# EAGLE board pdb_v3 (EAGLE 9.4.2)
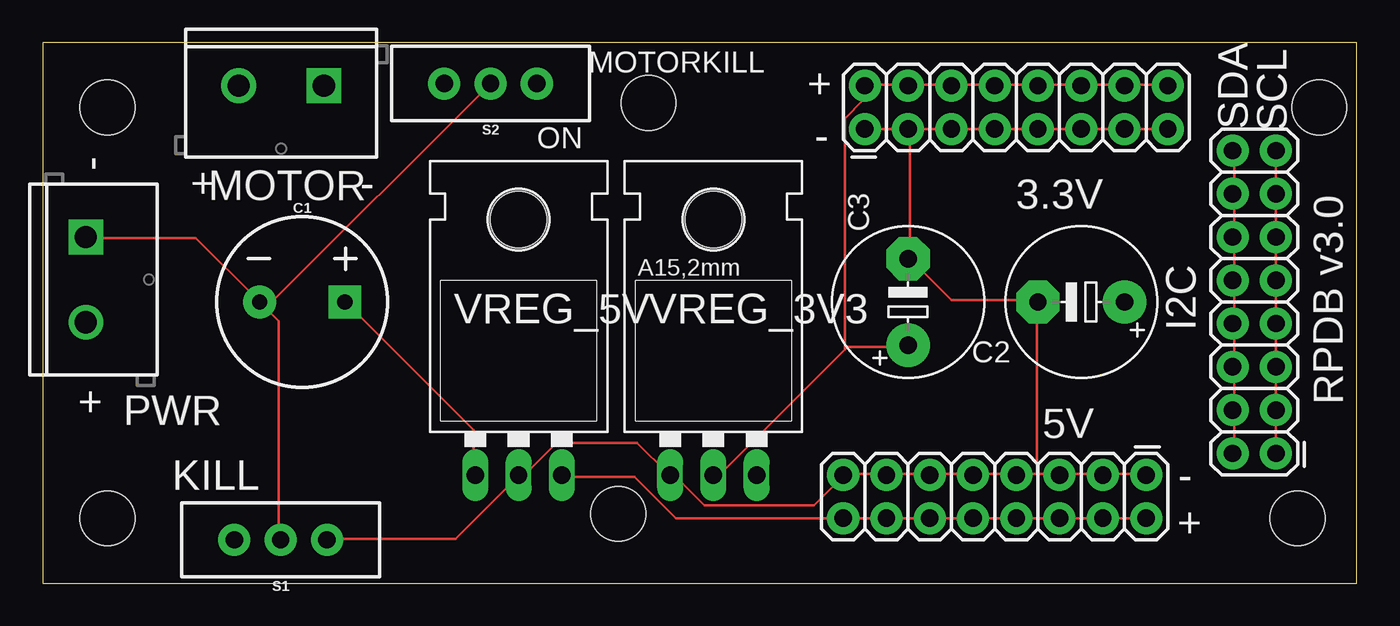
[diagram p0: board, top side]
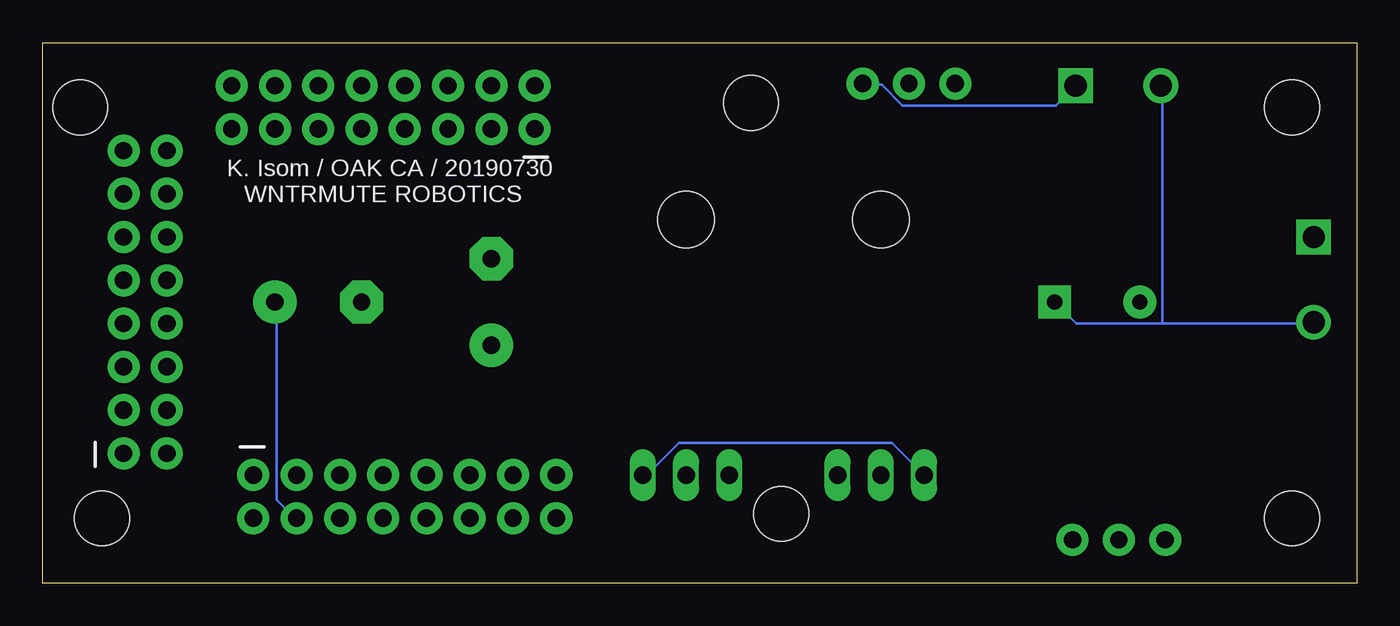
[diagram p1: board, bottom side, seen from below]

Size 77.14 x 31.74 mm. Coordinates in mm from the lower left corner, seen from the top.
Outline: 0,0 77.14,0 77.14,31.74 0,31.74 0,0
Copper layers (1*16): Top 0.035559375mm / dielectric 1.6mm / Bottom 0.035559375mm
Design rules "oshpark-2layer": minimum track width 6mil, minimum drill 10mil, track to track 6mil, track to pad 6mil, pad to pad 6mil, via to via 6mil, smd to smd 6mil, copper to edge 15mil, drill to drill 6mil, minimum pad ring 5mil, minimum via ring 5mil, stop-mask expansion 2.5mil, vias tented up to drill 0mil, thermal gap 10mil
Holes 3.2 mm at 3.81,27.94 3.81,3.81 74.93,27.94 73.66,3.81 33.78,4.06 35.56,28.19

## Footprints (pad centres in the part's own frame; a part is rotated, then mirrored left to right if it is on the bottom)
2X8 = drill 1.016 pad 1.88: 1 0,0; 2 0,2.54; 3 2.54,0; 4 2.54,2.54; 5 5.08,0; 6 5.08,2.54; 7 7.62,0; 8 7.62,2.54; 9 10.16,0; 10 10.16,2.54; 11 12.7,0; 12 12.7,2.54; 13 15.24,0; 14 15.24,2.54; 15 17.78,0; 16 17.78,2.54
CPOL-RADIAL-5MM-10MM = drill 0.9 pad 1.93 square: + 2.5,0 | drill 0.9 pad 1.93: - -2.5,0
E5-8,5 = drill 1.016 pad 2.54: + -2.54,0 | drill 1.016 pad 2.54 octagon: - 2.54,0
SCREWTERMINAL-5MM-2 = drill 1.3 pad 2.032 square: 1 0,0 | drill 1.3 pad 2.032: 2 5,0
SWITCH_SPDT_PTH_11.6X4.0MM_LOCK = drill 1.016 pad 1.88: 1 0,2.718; 2 0,0; 3 0,-2.718
78XXL = drill 1.016 long: GND 0,-3.81; IN -2.54,-3.81; OUT 2.54,-3.81 | hole 3.302: 0,11.176
TO-220-ALT = drill 1.016 long: GND 0,-3.81; IN -2.54,-3.81; OUT 2.54,-3.81 | hole 3.302: 0,11.176

## Placement (x,y rotation side)
3V3  [2X8]  48.26,26.67 0 top
5V  [2X8]  64.77,6.35 180 top
C1  1000uF  [CPOL-RADIAL-5MM-10MM]  15.24,16.51 0 top
C2  100uF  [E5-8,5]  60.96,16.51 180 top
C3  100uF  [E5-8,5]  50.8,16.51 90 top
DIRECT  [SCREWTERMINAL-5MM-2]  16.51,29.21 180 top
EXT  [SCREWTERMINAL-5MM-2]  2.54,20.32 270 top
FRAME1  FRAME-LETTERNO_PACKAGE  [DUMMY]  -41.91,52.07 0 top  (outside the outline)
I2C  [2X8]  72.39,7.62 90 top
S1  KILLSW  [SWITCH_SPDT_PTH_11.6X4.0MM_LOCK]  13.97,2.54 90 top
S2  MOTOKILL  [SWITCH_SPDT_PTH_11.6X4.0MM_LOCK]  26.29,29.34 90 top
VREG_3V3  LD33V  [78XXL]  39.37,10.16 0 top
VREG_5V  LM7805  [TO-220-ALT]  27.94,10.16 0 top

## Library data of the parts
3V3 5V I2C = SparkFun-Connectors
C1 = SparkFun-Capacitors; PROD_ID: CAP-09538
C2 C3 = rcl; SPICEPREFIX: C
DIRECT EXT = SparkFun-Connectors; SF_SKU: PRT-08432
FRAME1 = SparkFun-Aesthetics; DESIGNER: K. Isom / WNTRMUTE ROBOTICS; REV: 3.0; VERSION: 3.0
S1 S2 = SparkFun-Switches; PROD_ID: SWCH-08261; SF_SKU: COM-00102
VREG_3V3 = SparkFun-IC-Power
VREG_5V = SparkFun-IC-Power; PROD_ID: VREG-08450; SF_ID: COM-00107

## Nets
3.3V: 3V3.2 3V3.4 3V3.6 3V3.8 3V3.10 3V3.12 3V3.14 3V3.16 C3.+ VREG_3V3.GND
5V: 5V.2 5V.4 5V.6 5V.8 5V.10 5V.12 5V.14 5V.16 C2.+ VREG_5V.OUT
GND: 3V3.1 3V3.3 3V3.5 3V3.7 3V3.9 3V3.11 3V3.13 3V3.15 5V.1 5V.3 5V.5 5V.7 5V.9 5V.11 5V.13 5V.15 C2.- C3.- S1.3 VREG_3V3.IN VREG_5V.GND
N$1: C1.- EXT.1 S1.2 S2.2
N$7: I2C.1 I2C.3 I2C.5 I2C.7 I2C.9 I2C.11 I2C.13 I2C.15
N$9: I2C.2 I2C.4 I2C.6 I2C.8 I2C.10 I2C.12 I2C.14 I2C.16
N$11: DIRECT.1 S2.3
VCC: C1.+ DIRECT.2 EXT.2 VREG_3V3.OUT VREG_5V.IN

## Tracks (layer width: path | path; a pad name or v marks a point on that pad's centre or on a via)
3.3V
  Top 0.152: 53.34,29.26 50.9,29.26 3V3.4 50.75,29.26 48.31,29.26 3V3.2 48.16,29.11 48.16,28.35 47.09,27.28 47.09,13.72 | 3V3.16 65.99,29.26 63.55,29.26 3V3.14 63.4,29.26 60.96,29.26 | 60.96,29.26 58.52,29.26 3V3.10 58.37,29.26 55.93,29.26 3V3.8 55.78,29.26 53.34,29.26 | 60.96,29.26 3V3.12 | 53.34,29.26 3V3.6 | 47.09,13.72 47.24,13.87 50.75,13.87 C3.+ | 47.09,13.72 39.78,6.4 39.47,6.4 VREG_3V3.GND
5V
  Top 0.152: VREG_5V.OUT 30.48,6.25 34.75,6.25 37.19,3.81 5V.16 5V.14 5V.12 5V.10 5V.8 5V.6 5V.4 5V.2
  Bottom 0.152: C2.+ 63.4,16.46 63.4,4.88 62.33,3.81 5V.4
GND
  Top 0.152: S1.3 16.76,2.59 24.23,2.59 27.89,6.25 VREG_5V.GND 28.04,6.4 28.35,6.4 30.18,8.23 34.9,8.23 36.73,6.4 VREG_3V3.IN 36.88,6.25 37.19,6.25 38.86,4.57 45.26,4.57 46.94,6.25 5V.15 47.09,6.4 49.53,6.4 | 5V.1 64.77,6.4 62.33,6.4 5V.3 62.18,6.4 59.74,6.4 5V.5 59.59,6.4 58.37,6.4 | 57.15,6.4 54.71,6.4 5V.9 54.56,6.4 52.12,6.4 5V.11 51.97,6.4 49.53,6.4 | 49.53,6.4 5V.13 | 57.15,6.4 58.37,6.4 | 57.15,6.4 5V.7 | 3V3.15 3V3.13 3V3.11 3V3.9 3V3.7 3V3.5 50.9,26.67 | 3V3.1 3V3.3 50.9,26.67 | 50.9,26.67 50.9,19.05 | 50.9,19.05 53.34,16.61 58.37,16.61 C2.- 58.37,16.46 58.37,6.4 | 50.9,19.05 C3.-
N$1
  Top 0.152: 13.11,16.15 12.8,16.46 C1.- | 13.11,16.15 13.87,15.39 13.87,2.59 S1.2 | 13.11,16.15 S2.2 | 13.11,16.15 C1.- | EXT.1 2.59,20.27 8.99,20.27 12.65,16.61 C1.-
N$7
  Top 0.152: I2C.15 I2C.13 I2C.11 I2C.9 I2C.7 I2C.5 I2C.3 I2C.1
N$9
  Top 0.152: 69.95,22.86 69.95,25.3 I2C.16 | I2C.2 69.95,7.62 69.95,10.06 I2C.4 69.95,10.21 69.95,12.65 I2C.6 69.95,12.8 69.95,15.24 | 69.95,15.24 69.95,17.68 I2C.10 69.95,17.83 69.95,20.27 I2C.12 69.95,20.42 69.95,22.86 | 69.95,15.24 I2C.8 | 69.95,22.86 I2C.14
N$11
  Bottom 0.152: DIRECT.1 17.68,28.04 26.67,28.04 27.89,29.26 28.96,29.26 S2.3
VCC
  Top 0.152: VREG_5V.IN 25.3,6.4 25.3,8.99 17.83,16.46 C1.+
  Bottom 0.152: VREG_5V.IN 27.28,8.23 39.78,8.23 41.6,6.4 41.91,6.4 VREG_3V3.OUT | 11.43,15.24 16.46,15.24 17.68,16.46 C1.+ | 11.43,15.24 2.59,15.24 EXT.2 | 11.43,15.24 11.43,29.11 DIRECT.2

## Text on the board
tPlace: MOTORKILL | + | SDA | SCL | ON | - | - | + | MOTOR | - | 3.3V | I2C | RPDB v3.0 | + | PWR | 5V | KILL | - | +
bPlace: K. Isom / OAK CA / 20190730 | WNTRMUTE ROBOTICS